# Altium PCB ADR1399_BURN-IN_TOOL.PcbDoc
Units mm, origin at the board's own origin, x right, y up, seen from the top; angles counter-clockwise.
Board outline 141.5 x 111.5 mm, 2 copper layers (Top Layer, Bottom Layer); 50 components, 23 nets, 131 pads, 60 vias.
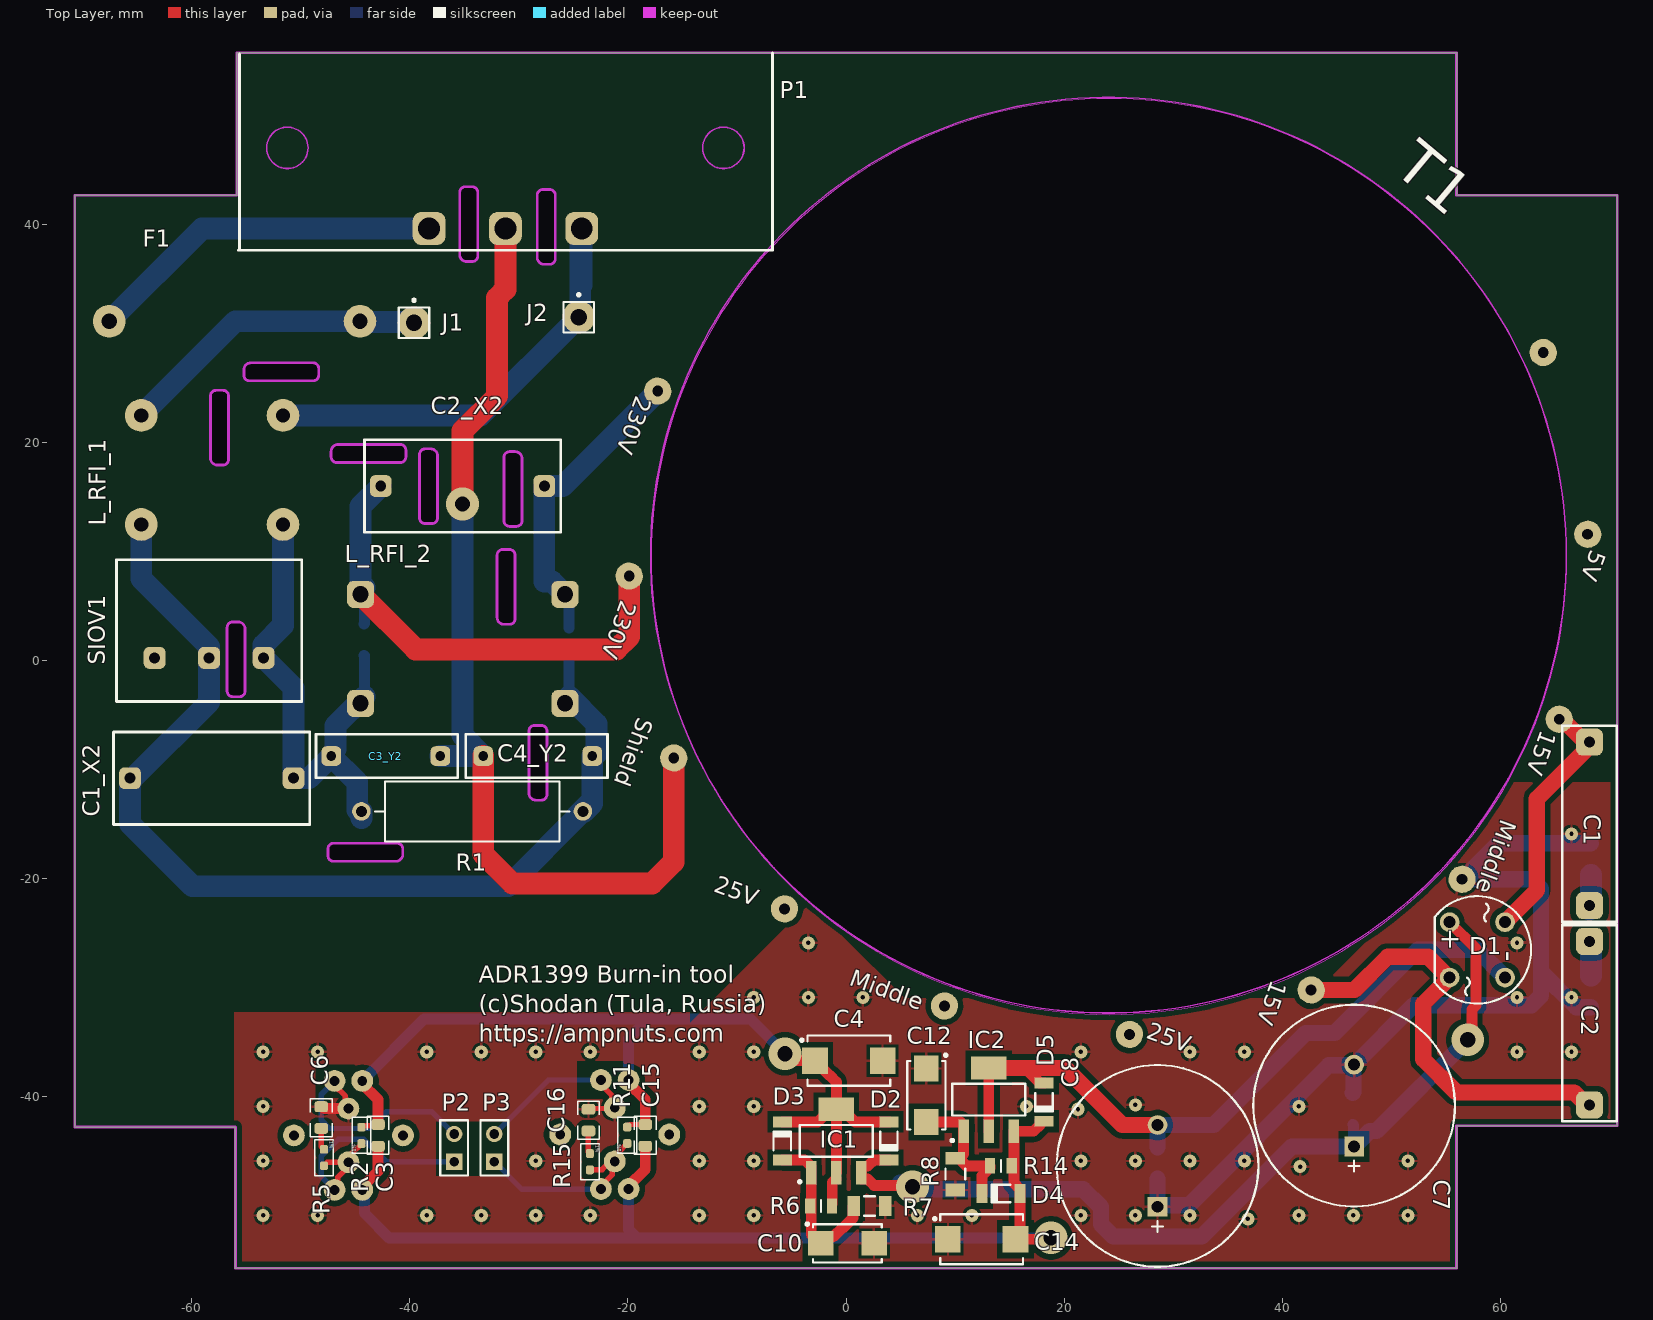
[diagram p0: Top Layer view]
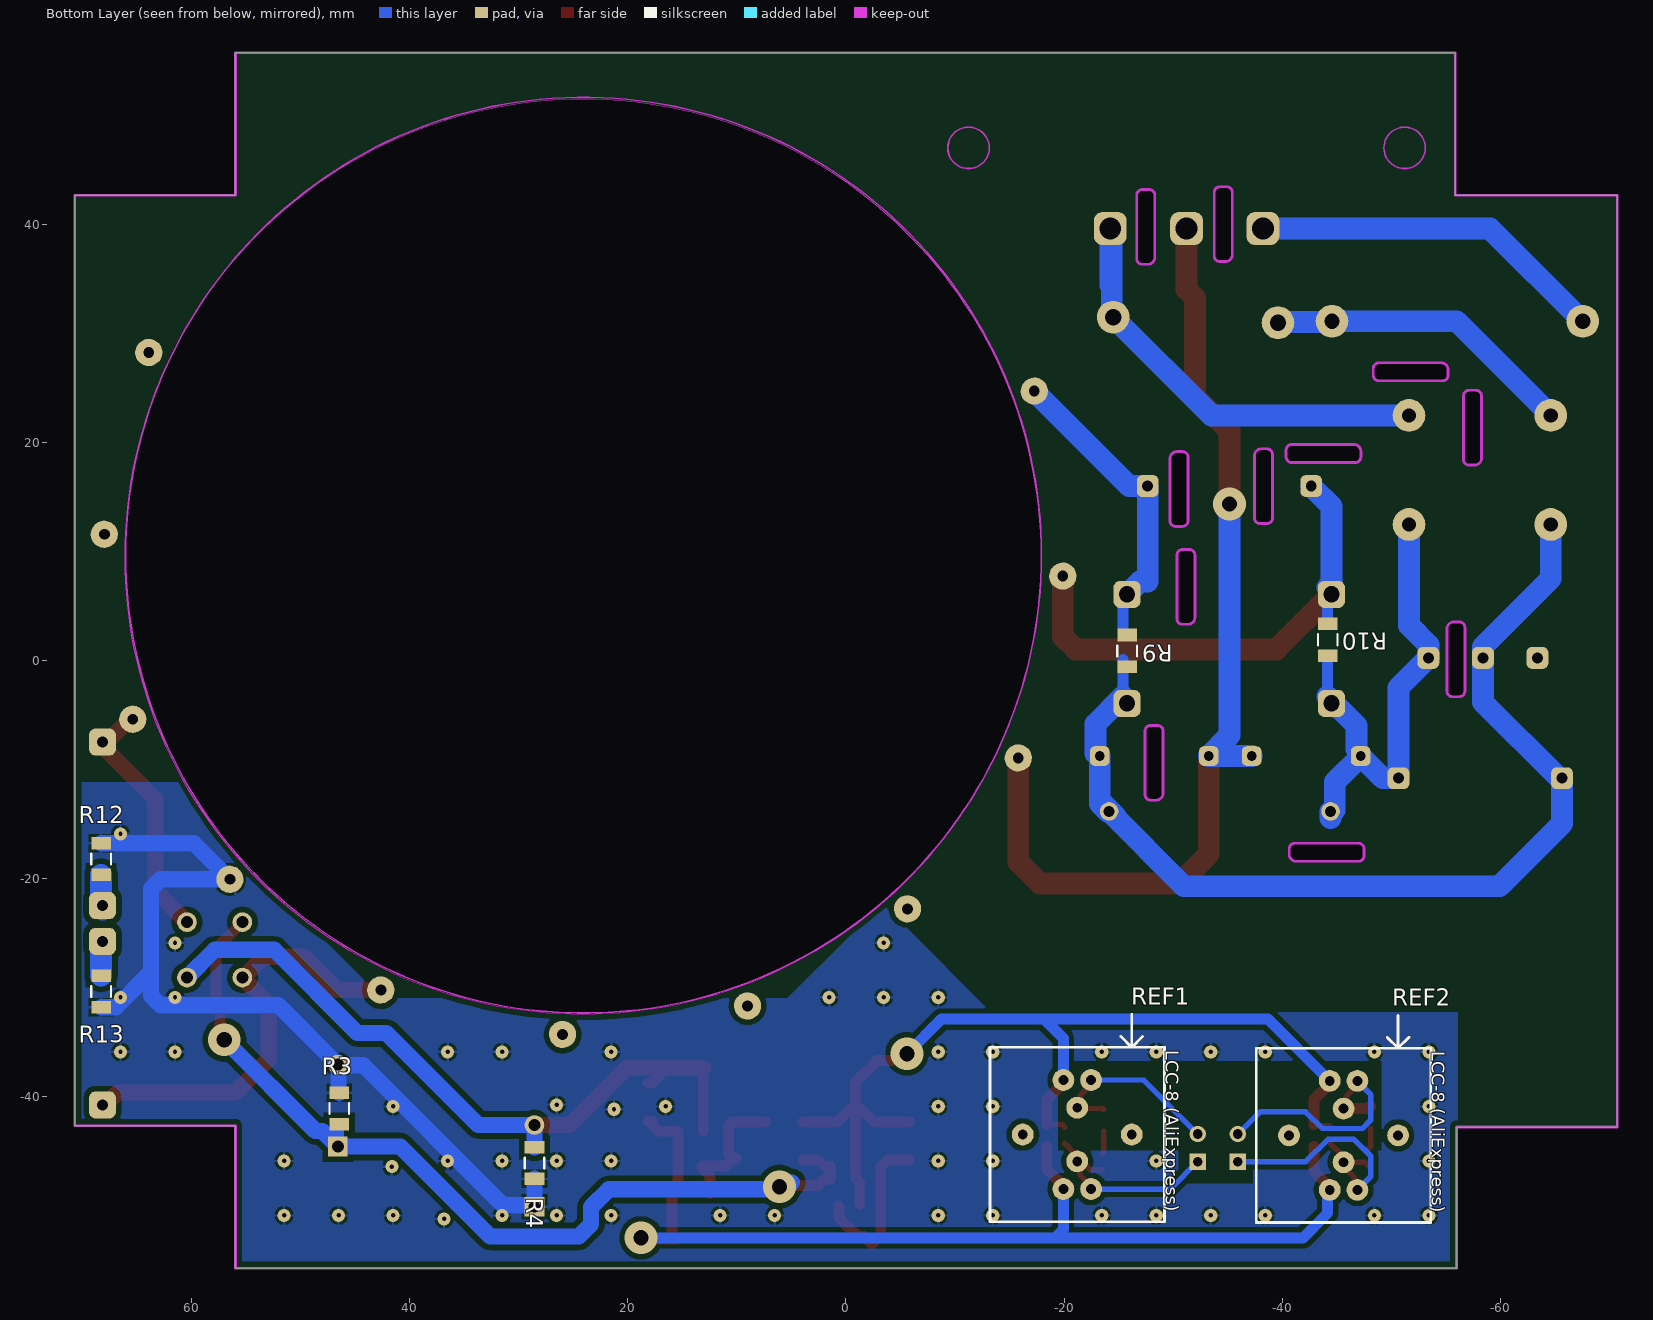
[diagram p1: Bottom Layer view, seen from below]
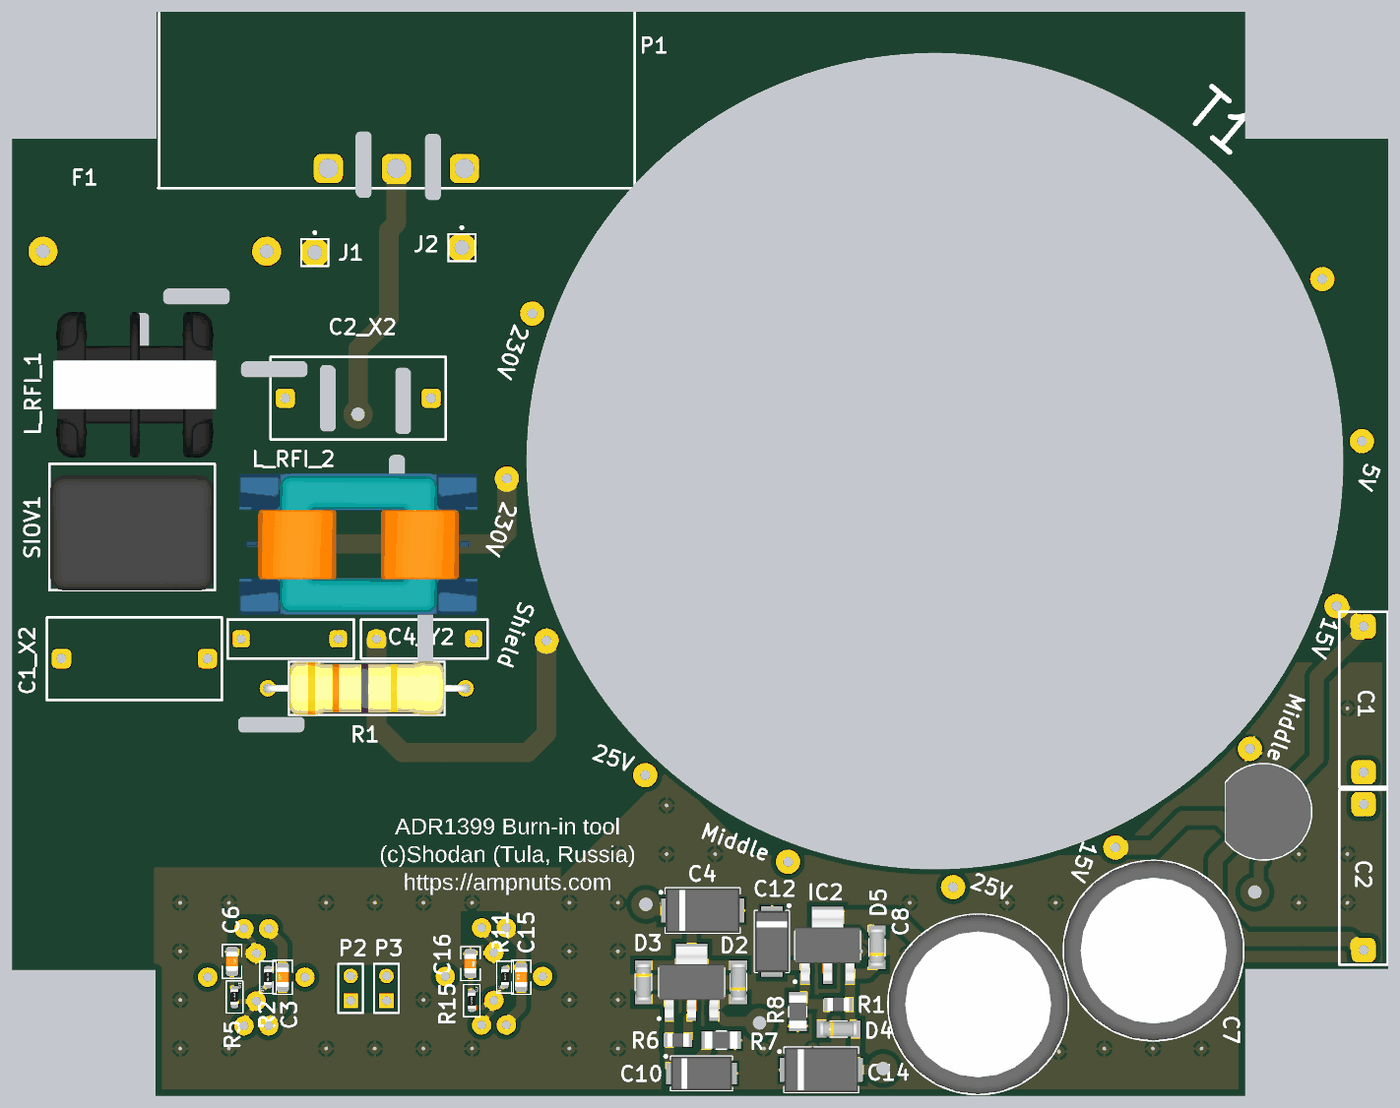
[diagram p2: 3D render of the assembled board from above, using the file's embedded part models]
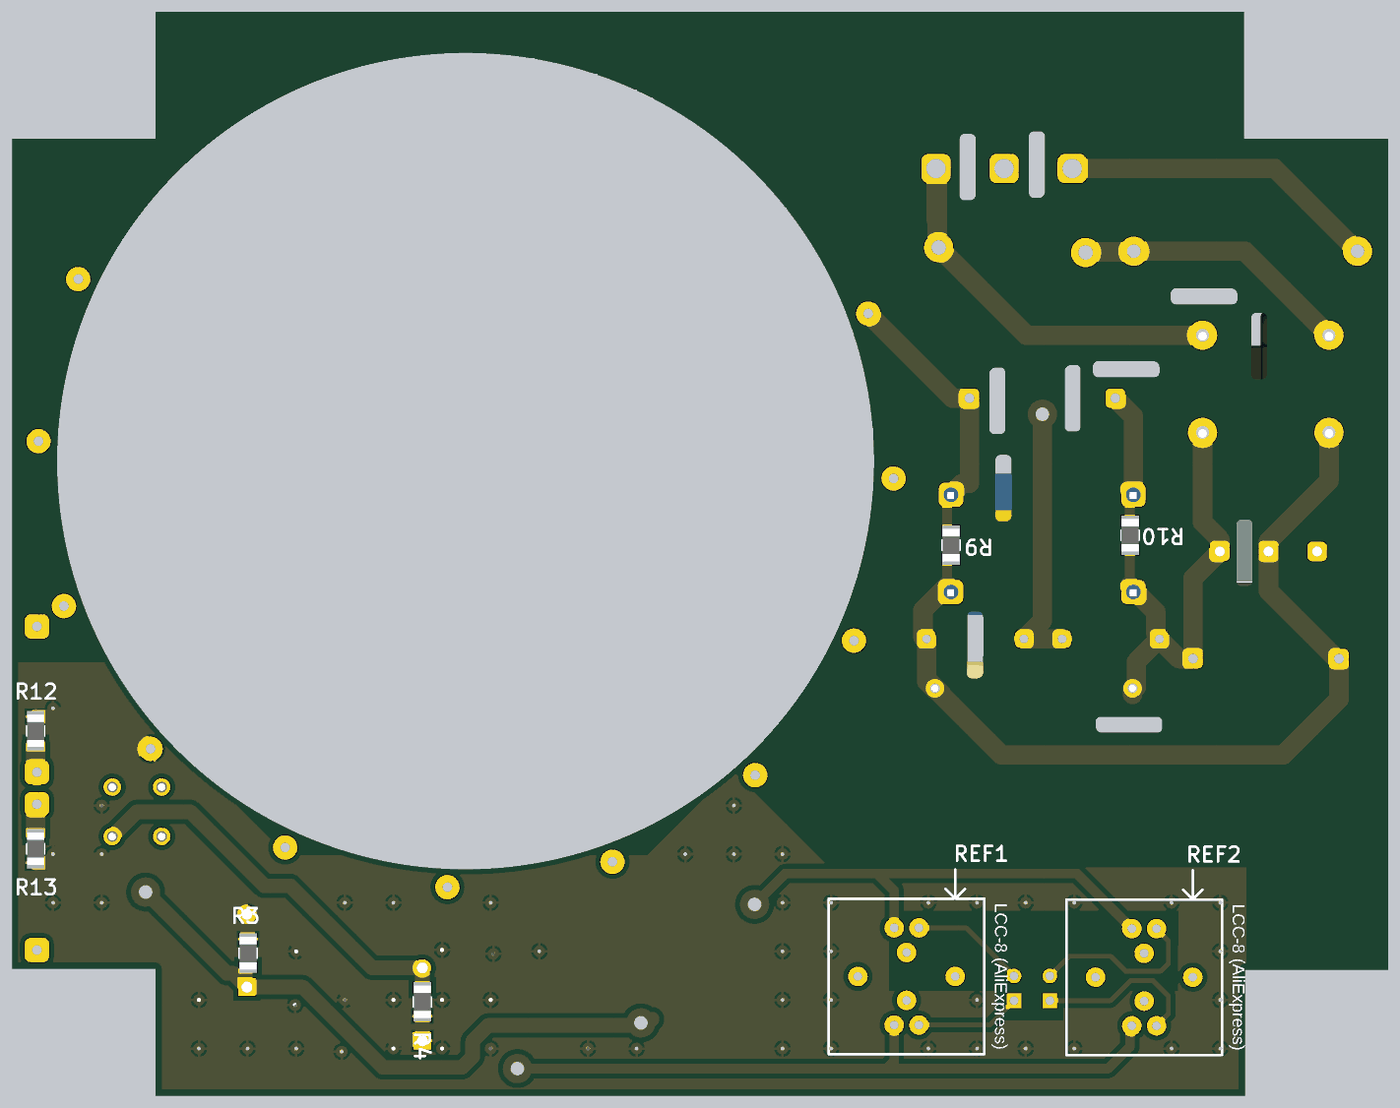
[diagram p3: 3D render of the assembled board from below, using the file's embedded part models]

## Layer stack, top to bottom
Top Solder: solder mask 0.0102, Solder Resist, Dk 3.5
Top Layer: signal copper 0.0356
Dielectric 1: dielectric 0.32, FR-4, Dk 4.8
Bottom Layer: signal copper 0.0356
Bottom Solder: solder mask 0.0102, Solder Resist, Dk 3.5

## Board outline
-56.007,-55.753 -56.007,-42.799 -70.75,-42.799 -70.75,42.672 -55.88,42.672 -55.88,55.75 56.007,55.75 56.007,42.672 70.75,42.672 70.75,-42.672 56.007,-42.672 56.007,-55.75
cut-out: -35.433,37.228 -35.433,42.943 cw(c-34.925,42.943) -34.925,43.451 -34.29,43.451 cw(c-34.29,42.943) -33.782,42.943 -33.782,37.101 cw(c-34.29,37.101) -34.29,36.593 -34.798,36.593 cw(c-34.798,37.228)
cut-out: -28.321,36.974 -28.321,42.689 cw(c-27.813,42.689) -27.813,43.197 -27.178,43.197 cw(c-27.178,42.689) -26.67,42.689 -26.67,36.847 cw(c-27.178,36.847) -27.178,36.339 -27.686,36.339 cw(c-27.686,36.974)
cut-out: -58.293,18.559 -58.293,24.274 cw(c-57.785,24.274) -57.785,24.782 -57.15,24.782 cw(c-57.15,24.274) -56.642,24.274 -56.642,18.432 cw(c-57.15,18.432) -57.15,17.924 -57.658,17.924 cw(c-57.658,18.559)
cut-out: -54.72,25.654 cw(c-54.72,26.162) -55.228,26.162 -55.228,26.67 cw(c-54.593,26.67) -54.593,27.305 -48.878,27.305 cw(c-48.878,26.797) -48.37,26.797 -48.37,26.162 cw(c-48.878,26.162) -48.878,25.654
cut-out: -38.608,12.556 cw(c-38.608,13.064) -39.116,13.064 -39.116,18.906 cw(c-38.608,18.906) -38.608,19.414 -38.1,19.414 cw(c-38.1,18.779) -37.465,18.779 -37.465,13.064 cw(c-37.973,13.064) -37.973,12.556
cut-out: -32.004,3.954 -32.004,9.669 cw(c-31.496,9.669) -31.496,10.177 -30.861,10.177 cw(c-30.861,9.669) -30.353,9.669 -30.353,3.827 cw(c-30.861,3.827) -30.861,3.319 -31.369,3.319 cw(c-31.369,3.954)
cut-out: -30.861,12.302 cw(c-30.861,12.81) -31.369,12.81 -31.369,18.652 cw(c-30.861,18.652) -30.861,19.16 -30.353,19.16 cw(c-30.353,18.525) -29.718,18.525 -29.718,12.81 cw(c-30.226,12.81) -30.226,12.302
cut-out: -46.719,18.161 cw(c-46.719,18.669) -47.227,18.669 -47.227,19.177 cw(c-46.592,19.177) -46.592,19.812 -40.877,19.812 cw(c-40.877,19.304) -40.369,19.304 -40.369,18.669 cw(c-40.877,18.669) -40.877,18.161
cut-out: -47.515,-17.907 -47.515,-17.272 cw(c-47.007,-17.272) -47.007,-16.764 -41.165,-16.764 cw(c-41.165,-17.272) -40.657,-17.272 -40.657,-17.78 cw(c-41.292,-17.78) -41.292,-18.415 -47.007,-18.415 cw(c-47.007,-17.907)
cut-out: -29.083,-12.175 -29.083,-6.46 cw(c-28.575,-6.46) -28.575,-5.952 -27.94,-5.952 cw(c-27.94,-6.46) -27.432,-6.46 -27.432,-12.302 cw(c-27.94,-12.302) -27.94,-12.81 -28.448,-12.81 cw(c-28.448,-12.175)
cut-out: -56.769,-2.811 -56.769,3.031 cw(c-56.261,3.031) -56.261,3.539 -55.753,3.539 cw(c-55.753,2.904) -55.118,2.904 -55.118,-2.811 cw(c-55.626,-2.811) -55.626,-3.319 -56.261,-3.319 cw(c-56.261,-2.811)
cut-out: -17.87,9.525 ccw(c24.13,9.525) 24.13,-32.475 ccw(c24.13,9.525) 66.13,9.525 ccw(c24.13,9.525) 24.13,51.525 ccw(c24.13,9.525)

## Design rules (kind name [scope] priority, off if disabled: settings)
Clearance [All] p1: gap=0.5 ignorepadtopadclearanceinfootprint=FALSE
Height [All] p1: minheight=0 maxheight=40 prefheight=12.7
PolygonConnect [All] p1: connectstyle=Relief reliefconductorwidth=0.254 reliefentries=4 polygonreliefangle="90 Angle" airgapwidth=0.254
RoutingVias [All] p1: holewidth=0.711 width=1.27 viastyle="Through Hole" minholewidth=0.711 minwidth=1.27 maxholewidth=0.711 maxwidth=1.27
SolderMaskExpansion [All] p1: expansion=0.102 istentingtop=FALSE
Width [All] p1: maxlimit=4 minlimit=0.254 preferedwidth=2
29 further rules are at their usual default settings.

## Components (designator, comment, footprint, x,y, rotation, side; value= is the part's Value field where it differs from the comment)
C1 "1uF 63VAC" B32522C1105 68.199,-22.479 r90 top
C1_X2 "B32922C3104K 100nF" B32922D3334K -50.673,-10.795 r180 top value=330nF
C2 "1uF 63VAC" B32522C1105 68.199,-40.767 r90 top
C2_X2 "B32922C3104K 100nF" B32922D3334K -42.672,16.002 r0 top value=330nF
C3 "1uF" C0805(2013) -42.926,-43.561 r90 top
C3_Y2 "B32021A3152 1.5nF" B32021A3152 -37.211,-8.763 r180 top value=330nF
C4 "2.2uF 50V D" CAPMP7343X310N 0.254,-36.703 r0 top
C4_Y2 "B32021A3152 1.5nF" B32021A3152 -33.274,-8.763 r0 top value=330nF
C6 "1uF" C0805(2013) -48.133,-41.926 r270 top
C7 "2200uF 50V" CAPPR750-1850X3750 46.609,-40.827 r90 top
C8 "2200uF 50V" CAPPR750-1850X3750 28.575,-46.355 r90 top
C10 "10uF 35V C" CAPMP6032X280N 0.127,-53.467 r0 top
C12 "10uF 35V C" CAPMP6032X280N 7.366,-39.878 r270 top
C14 "2.2uF 50V D" CAPMP7343X310N 12.446,-53.086 r0 top
C15 "1uF" C0805(2013) -18.415,-43.561 r90 top
C16 "1uF" C0805(2013) -23.622,-42.164 r270 top
D1 "2W10G-E4/51" VISHAY_WOG 57.912,-26.543 r90 top
D2 "EGL1D" DIOMELF3515N 3.937,-44.069 r90 top
D3 "EGL1D" DIOMELF3515N -5.842,-44.069 r270 top
D4 "EGL1D" DIOMELF3515N 14.224,-48.895 r0 top
D5 "EGL1D" DIOMELF3515N 18.161,-40.513 r90 top
F1 "Fuse 0.5A" FUSE -67.577,31.115 r0 top
IC1 "LM317DCYR" SOT230P700X180-4N -0.889,-44.069 r90 top
IC2 "LM337IMP" SOT230P700X180-4N 13.095,-40.28 r90 top
J1 "Socket" PIN1 -39.624,30.988 r0 top
J2 "Socket" PIN1 -24.511,31.496 r0 top
L_RFI_1 "PLA10AN2221R5R2B" PLA10AN2221R5R2B -64.643,12.479 r90 top
L_RFI_2 "B82732F2601B001" B82732F -44.531,6.063 r0 top
P1 "Plug AC Male" AS-205 -31.242,39.624 r0 top
P2 "Header 2" HDR1X2 -35.941,-45.974 r90 top
P3 "Header 2" HDR1X2 -32.258,-45.974 r90 top
R1 "1M 2W" RES_TYCO_CFR200 -34.29,-13.843 r0 top
R2 "2K67" R0603-1% -44.45,-43.561 r90 top
R3 "6k8 1206" RESC3216X65N 46.482,-41.095 r270 bottom
R4 "6k8 1206" RESC3216X65N 28.575,-46.101 r270 bottom
R5 "5R1" R0603-1% -47.879,-45.593 r270 top
R6 "220R 0805" RESC2012X60N -2.286,-50.038 r0 top
R7 "2k4 1206" RESC3216X65N 2.159,-50.038 r180 top
R8 "2k4 1206" RESC3216X65N 10.033,-47.117 r270 top
R9 "DNI (1206)" RESC3216X65N -25.781,0.889 r90 bottom
R10 "DNI (1206)" RESC3216X65N -44.196,1.905 r90 bottom
R11 "2K67" R0603-1% -20.066,-43.549 r90 top
R12 "10R (1206)" RESC3216X65N 68.326,-18.214 r270 bottom
R13 "10R (1206)" RESC3216X65N 68.326,-30.353 r90 bottom
R14 "220R 0805" RESC2012X60N 14.208,-46.355 r180 top
R15 "5R1" R0603-1% -23.495,-45.974 r270 top
REF1 "ADR1399KEZ" "LCC-8 socket" -21.209,-43.481 r270 bottom
REF2 "ADR1399KEZ" "LCC-8 socket" -45.64,-43.561 r270 bottom
SIOV1 "B72214T2271K105" B72214T2271K105 -58.42,0.237 r0 top
T1 "OCM T/230/E/50-25/30-15/5-0.025-50-II" "OCM T/230/E/50-25/30-15/5-0.025-50-II" 24.075,9.66 r250 top locked

## Footprints (in the part's own frame and the unit in brackets; to place one, negate y for a bottom-side part, rotate by r counter-clockwise, add the part's x,y. Pads: shape width x height; smd on the part's side, far side on the other; paste and mask are expansions set on the pad)
AS-205 [mm]
  rrect50% 3x3 hole 2: 1(-7,0) 2(7,0) 3(0,0)
  Keep-Out Layer circle w0.15: c20,7.4 r1.9
  Keep-Out Layer circle w0.15: c-20,7.4 r1.9
  silkscreen extent -24.5,-2 24.5,16.1
B32021A3152 [mm]
  rrect50% 1.8x1.8 hole 0.9: 1(0,0) 2(10,0)
  silkscreen extent -1.6,-2 11.4,2, body extent -1.7,-2 11.3,2, height 9
B32522C1105 [mm]
  rrect50% 2.5x2.5 hole 1: 1(0,0) 2(15,0)
  silkscreen extent -1.5,-2.5 16.5,2.5, body extent -1.5,-2.5 16.4,2.5, height 10.5
B32922D3334K [mm]
  rrect50% 2x2 hole 1: 1(0,0) 2(15,0)
  silkscreen extent -1.49,-4.25 16.51,4.26, body extent -1.5,-4.3 16.5,4.3, height 14.5
B72214T2271K105 [mm]
  rrect50% 2x2 hole 1: 1(5,0) 2(-5,0) 3(0,0)
  silkscreen extent -8.5,-4 8.5,9, body extent -8.4,-4 8.4,7.8, height 21.8
B82732F [mm]
  rrect50% 2.5x2.5 hole 1.5: 1(0,0) 2(0,-10) 3(18.75,-10) 4(18.75,0)
  body extent -2.86,-12.33 21.64,2.17, height 14.1
C0805(2013) [mm]
  rrect50% 1x1.25 smd: 1(-1,0) 2(1,0)
  silkscreen extent -1.75,-1 1.75,1, body extent -1,-0.62 1,0.63, height 0.73
CAPMP6032X280N [mm] "Capacitor, Polarized, Molded  Body 6.0x3.2mm, IPC Medium Density"
  rect 2.35x2.25 smd: 1(-2.45,0) 2(2.45,0)
  silkscreen extent -3.8,-1.75 3.15,1.9, body extent -3.15,-1.75 3.15,1.75, height 2.8
CAPMP7343X310N [mm] "Capacitor, Polarized, Molded  Body 7.3x4.3mm, IPC Medium Density"
  rect 2.35x2.45 smd: 1(-3.1,0) 2(3.1,0)
  silkscreen extent -4.42,-2.3 3.8,2.3, body extent -3.8,-2.3 3.8,2.3, height 3.1
CAPPR750-1850X3750 [mm] "Capacitor, Radial, Pin spacing 7.5mm - Body Diameter 18.5mm X Body  Height 37.5mm"
  rect 1.8x1.8 hole 1.1: 1(-3.75,0)
  round 1.8 hole 1.1: 2(3.75,0)
  silkscreen extent -9.25,-9.25 9.25,9.25, body extent -9.25,-9.22 9.25,9.22, height 37.5
DIOMELF3515N [mm] "SOD80C, MELF Diode, 2-Leads, Body 3.5x1.5mm, IPC Medium Density"
  rect 1x1.75 smd: 1(-1.75,0) 2(1.75,0)
  silkscreen extent -0.85,-0.8 0.85,0.8, body extent -1.85,-0.8 1.85,0.8, height 1.6
FUSE [mm]
  round 3 hole 1.4: 1(0,0) 2(23,0)
  body extent -1.95,-5.32 25.05,5.18, height 16
HDR1X2 [mm] "Connector; Header; 2 Position"
  rect 1.5x1.5 hole 0.9: 1(0,0)
  round 1.5 hole 0.9: 2(2.54,0)
  silkscreen extent -1.27,-1.27 3.81,1.27
"LCC-8 socket" [mm]
  round 2 hole 0.9: 1(-5,1.27) 2(-2.46,0) 3(-5,-1.27) 4(0,-5) 5(5,-1.27) 6(2.46,0) 7(5,1.27) 8(0,5)
  silkscreen extent -11,-8 8,8, body extent -8,-8 8,8, height 20
"OCM T/230/E/50-25/30-15/5-0.025-50-II" [mm]
  round 2.5 hole 1: 1(0,-44) 2(16.838,-40.651) 3(31.113,-31.113) 4(40.651,-16.838) 5(44,0) 6(40.651,16.838) 7(31.113,31.113) 8(16.838,40.651) 9(0,44) 10(-16.838,40.651) 11(-31.113,31.113)
  Keep-Out Layer circle w0.15: c0,0 r42
  body extent 4.5,-44.2 6.3,-43.1, height 1.27
PIN1 [mm] "Generic Antenna; 1 Lead"
  round 3 hole 1.5: 1(0,0)
  silkscreen extent -1.4,-1.4 1.4,2.17
PLA10AN2221R5R2B [mm]
  round 3 hole 1.3: 1(0,0) 2(10,0) 3(10,-13) 4(0,-13)
  body extent -2.6,-14.88 12.4,1.91, height 16.3
R0603-1% [mm]
  rrect50% 0.8x0.75 smd: 1(-0.75,0) 2(0.75,0)
  silkscreen extent -1.65,-0.85 1.65,0.85, body extent -0.8,-0.41 0.8,0.39, height 0.45
RES_TYCO_CFR200 [mm] "Resistor, Axial, Pad spacing 20.32mm - Body Lengh 16mm X Body Diameter 5.5mm"
  round 1.7 hole 1: 1(-10.16,0) 2(10.16,0)
  silkscreen extent -8.91,-2.75 8.91,2.75, body extent -10.53,-2.75 10.54,2.75, height 5.5
RESC2012X60N [mm] "Chip Resistor, EIA 0805, Metric 2012, Body 2.0x1.2mm, IPC Medium Density"
  rect 0.95x1.4 smd: 1(-1,0) 2(1,0)
  silkscreen extent 0,-0.55 0,0.55, body extent -1.1,-0.67 1.1,0.68, height 0.6
RESC3216X65N [mm] "Chip Resistor, EIA 1206, Metric 3216, Body 3.2x1.6mm, IPC Medium Density"
  rect 1.15x1.8 smd: 1(-1.45,0) 2(1.45,0)
  silkscreen extent -0.5,-0.9 0.5,0.9, body extent -1.67,-0.87 1.68,0.88, height 0.65
SOT230P700X180-4N [mm] "SOT223, 2.30mm pitch; 3 pin, 3.70mm W X 6.70mm L, IPC Medium Density"
  rect 2.15x0.95 smd: 1(-2.9,2.3) 2(-2.9,0) 3(-2.9,-2.3)
  rect 2.15x3.25 smd: 4(2.9,0)
  silkscreen extent -3.87,-3.35 1.45,3.47, body extent -3.65,-3.35 3.65,3.35, height 1.81
VISHAY_WOG [mm] "Bridge Rectifier, Body 9.35m x 8.33mm, VISHAY Case Type WOG"
  round 1.8 hole 1.1: 1(2.54,2.54) 2(2.54,-2.54) 3(-2.54,-2.54) 4(-2.54,2.54)
  silkscreen extent -4.93,-4.93 4.93,3.91, body extent -4.93,-4.93 4.93,3.91, height 13.5

## Part data
C1 C1_X2 C2 C2_X2 C3_Y2 C4_Y2: library part CPPR_330NF_630V_5%_2250-1050X2650X1650, "Non-polarised capacitor", Case="LS22.5 W10.5 x L26.5 x H16.5", Manufacturer=TDK, Manufacturer Part Number=B32653A6334J000, Tolerance=±5%, Voltage=630VDC/250VAC, Author="CERN DEM JLC", Component Type=Standard, ComponentHeight=16.5mm, CreateDate=20.12.2007, HelpURL=\\cern.ch\dfs\Applications\Altium\Datasheets\CPPR_TDK_B32653.pdf, LatestRevisionDate=22.04.2015, Mounted=Yes, Part Description="Metallized Polypropylene Film Capacitor (MKP)", Part Number=CPPR_330NF_630V_5%_2250-1050X2650X1650, Pin Count=2, Sense=No, SMD=No, Socket=No, Status=None
C3 C6 C15 C16: library part CC1206_1UF_25V_10%_X7R, "Non-polarised capacitor", Case=1206, Manufacturer=GENERIC, Manufacturer1 ComponentHeight=1.75mm, Manufacturer1 Example=KEMET, Manufacturer1 Part Number=C1206C105K3RAC, Tolerance=±10%, Voltage=25V, Author="CERN DEM JLC", Component Type=Standard, CreateDate=03.12.2007, HelpURL=\\cern.ch\dfs\Applications\Altium\Datasheets\CC1206_X7R_KEMET.pdf, LatestRevisionDate=03.12.2007, Manufacturer Part Number=CC1206_1UF_25V_10%_X7R, Mounted=Yes, Part Description="SMD Multilayer Chip Ceramic Capacitor", Part Number=CC1206_1UF_25V_10%_X7R, Pin Count=2, Sense=No, SMD=Yes, Socket=No, Status=Preferred, TC=X7R
C4 C14: library part CTE7343-31_22UF_35V_20%_LESR0400, "Polarised capacitor", Case=D, Manufacturer=GENERIC, Manufacturer1 ComponentHeight=3.1mm, Manufacturer1 Example=AVX, Manufacturer1 Part Number=TPSD226M035R0400, Tolerance=±20%, Voltage=35V, Author="CERN DEM MR", Component Type=Standard, CreateDate=19.05.2016, HelpURL=\\cern.ch\dfs\Applications\Altium\Datasheets\CTE-LESR_AVX_TPS.pdf, LatestRevisionDate=19.05.2016, Manufacturer Part Number=CTE7343-31_22UF_35V_20%_LESR0400, Mounted=Yes, Part Description="Low ESR 0R4 Solid Tantalum Chip Capacitor", Part Number=CTE7343-31_22UF_35V_20%_LESR0400, Pin Count=2, Sense=No, SMD=Yes, Socket=No, Status=None
C7 C8: library part CAER_10000UF_16V_20%_CHEMI-CON_EKYB160ELL103MMP1S, "Polarised capacitor", Case="LS7.5 D18 x H35.5", Manufacturer="UNITED CHEMI-CON", Manufacturer Part Number=EKYB160ELL103MMP1S, Tolerance=±20%, Voltage=16V, Author="CERN DEM JLC", Component Type=Standard, ComponentHeight=37mm, CreateDate=02.06.2015, HelpURL=\\cern.ch\dfs\Applications\Altium\Datasheets\CAER_CHEMI-CON_KYB.pdf, LatestRevisionDate=02.06.2015, Mounted=Yes, Part Description="Z=0R012 Miniature Aluminium Electrolytic Capacitor", Part Number=CAER_10000UF_16V_20%_CHEMI-CON_EKYB160ELL103MMP1S, Pin Count=2, Sense=Yes, SMD=No, Socket=No, Status=None
C10 C12: library part CTE6032-28_10UF_25V_10%_LESR0500, "Polarised capacitor", Case=C, Manufacturer=GENERIC, Manufacturer1 ComponentHeight=2.8mm, Manufacturer1 Example=AVX, Manufacturer1 Part Number=TPSC106K025R0500, Tolerance=±10%, Voltage=25V, Author="CERN DEM JLC", Component Type=Standard, CreateDate=05.05.2008, HelpURL=\\cern.ch\dfs\Applications\Altium\Datasheets\CTE-LESR_AVX_TPS.pdf, LatestRevisionDate=20.01.2009, Manufacturer Part Number=CTE6032-28_10UF_25V_10%_LESR0500, Mounted=Yes, Part Description="Low ESR 0R5 Solid Tantalum Chip Capacitor", Part Number=CTE6032-28_10UF_25V_10%_LESR0500, Pin Count=2, Sense=No, SMD=Yes, Socket=No, Status=Preferred
D1: library part W005G-E4/51, "Bridge Rectifier 1+ 2AC 3- 4AC", Manufacturer="VISHAY GENERAL SEMICONDUCTOR", Power=1.5A, Voltage=50V, Author="CERN DEM JLC", Bonding=No, Component Type=Standard, ComponentHeight=13.5mm, CreateDate=20.09.2011, Device=2W10G-E4/51, HelpURL=\\cern.ch\dfs\Applications\Altium\Datasheets\W005G-E4-51.pdf, LatestRevisionDate=08.04.2016, Manufacturer Part Number=W005G-E4/51, Mounted=Yes, PackageDescription="Bridge Rectifier, Body 9.35m x 8.33mm, VISHAY Case Type WOG", Part Description="Glass Passivated Single-Phase Bridge Rectifier", Part Number=W005G-E4/51, Pin Count=4, PressFit=No, Sense=No, SMD=No, Socket=No
D2 D3 D4 D5: library part PMLL4148L, "Diode", Case=SOD-80C, Manufacturer="NXP SEMICONDUCTORS", Power=200mA, Voltage=75V, Author="CERN DEM JLC", Bonding=No, Component Type=Standard, ComponentHeight=1.6mm, CreateDate=30.03.2009, Device=EGL1D, HelpURL=\\cern.ch\dfs\Applications\Altium\Datasheets\PMLL4148L.pdf, LatestRevisionDate=09.12.2009, Manufacturer Part Number=PMLL4148L, Mounted=Yes, PackageDescription="SOD80C, MELF Diode, 2-Leads, Body 3.5x1.5mm, IPC Medium Density", Part Description="High-speed switching diodes", Part Number=PMLL4148L, Pin Count=2, PressFit=No, Sense=No, SMD=Yes, Socket=No, Status="Not recommended"
F1: library part "Fuse 1", "Fuse", LatestRevisionDate=17-Jul-2002, LatestRevisionNote="Re-released for DXP Platform.", PackageDescription="Thru-Hole; 2 Leads", PackageReference=PIN-W2/E2.8, Published=8-Jun-2000, Publisher="Altium Limited"
IC1: library part LM317EMP, "3-Terminal Regulator 1=Adj 2=OUT 3=IN 4=OUT", Case=SOT-223, Manufacturer="TEXAS INSTRUMENTS", Author="CERN DEM JLC", Bonding=No, Component Type=Standard, ComponentHeight=1.8mm, CreateDate=02.12.2008, Device=LM317DCYR, HelpURL=\\cern.ch\dfs\Applications\Altium\Datasheets\LM317EMP.pdf, LatestRevisionDate=16.09.2014, Manufacturer Part Number=LM317EMP, Mounted=Yes, PackageDescription="SOT223, 2.30mm pitch; 3 pin, 3.70mm W X 6.70mm L, IPC Medium Density", Part Description="3-Terminal 1.2V To 37V 1A Positive Adjustable Regulator", Part Number=LM317EMP, Pin Count=4, PressFit=No, Sense=No, SMD=Yes, Socket=No, Status="Not Recommended"
IC2: library part LM337IMP/NOPB, "3-Terminal Regulator 1=Adj 2=IN 3=OUT 4=IN", Case=SOT-223, Manufacturer="TEXAS INSTRUMENTS", Author="CERN DEM JLC", Bonding=No, Component Type=Standard, ComponentHeight=1.8mm, CreateDate=31.08.2010, Device=LM337IMP, HelpURL=\\cern.ch\dfs\Applications\Altium\Datasheets\LM337IMP-NOPB.pdf, LatestRevisionDate=21.09.2015, Manufacturer Part Number=LM337IMP/NOPB, Mounted=Yes, PackageDescription="SOT223, 2.30mm pitch; 3 pin, 3.70mm W X 6.70mm L, IPC Medium Density", Part Description="3-Terminal -1.2V To -37V 1A Adjustable Negative Regulator", Part Number=LM337IMP/NOPB, Pin Count=4, PressFit=No, Sense=No, SMD=Yes, Socket=No
L_RFI_2: library part PLA10AN2221R5R2B
P1: "IEC Mains Power Inlet, EN60 320-1 C14 Class I Cold Condition, PC Flange Rear Mount, Chassis Plug", MaximumRating="10A, 250V a.c. (UL & CSA 15A, 250V a.c.)", PackageDocument="ver.80, 15-Sep-2003", ComponentLink1Description="Manufacturer Link", ComponentLink1URL=http://www.bulgin.co.uk/, DatasheetDocument="ver.80, 15-Sep-2003", DrillSize="Corresponds to nominal value.", LatestRevisionDate=15-Jul-2004, LatestRevisionNote="Component Replaced.", MountingFixtures="Not drawn on schematic symbol.", Note="IEC Color Scheme employed for L, N and E.", PackageReference=PX0580/PC, PCB_Layout="Complies with manufacturer's recommendation.", Published=15-Jul-2004, Publisher="Altium Limited", Terminations="P.C. Spills"
P2 P3: "Header, 2-Pin", LatestRevisionDate=17-Jul-2002, LatestRevisionNote="Re-released for DXP Platform.", Publisher="Altium Limited"
R1: library part RCF_NO-VALUE_5%_2W_0-450PPM_TYCO_CFR200, "Resistor - 5%", Case="LS20.32 L16 x D5.5", Manufacturer="TYCO ELECTRONICS", Manufacturer Part Number=CFR200J, Power=2W, Tolerance=±5%, Author="CERN DEM JLC", Component Type=Standard, ComponentHeight=5.5mm, CreateDate=10.03.2014, HelpURL=\\cern.ch\dfs\Applications\Altium\Datasheets\RCF_TYCO_CFR200.pdf, LatestRevisionDate=03.06.2014, Mounted=No, Part Description="Carbon Film Fixed Resistor - CFR  Series", Part Number=RCF_NO-VALUE_5%_2W_0-450PPM_TYCO_CFR200, Pin Count=2, PressFit=No, Sense=No, SMD=No, Socket=No, Status=None, TC="0 -450ppm/°C"
R2 R5 R11 R15: library part R1206_5R6_1%_0.25W_200PPM, "Resistor - 1%", Case=1206, Manufacturer=GENERIC, Manufacturer1 ComponentHeight=0.65mm, Manufacturer1 Example="YAGEO PHYCOMP", Manufacturer1 Part Number="232272465608L or RC1206FR-075R6L", Power=0.25W, Tolerance=±1%, Author="CERN DEM JLC", Component Type=Standard, CreateDate=24.06.2009, HelpURL=\\cern.ch\dfs\Applications\Altium\Datasheets\R1206_Phycomp_RC1206.pdf, LatestRevisionDate=17.10.2012, Manufacturer Part Number=R1206_5R6_1%_0.25W_200PPM, Mounted=Yes, Part Description="General Purpose Thick Film Chip Resistor", Part Number=R1206_5R6_1%_0.25W_200PPM, Pin Count=2, PressFit=No, Sense=No, SMD=Yes, Socket=No, Status=Preferred, TC=±200ppm/°C
R3 R4 R7 R8 R9 R10 R12 R13: library part R1206_2K4_1%_0.25W_100PPM, "Resistor - 1%", Case=1206, Manufacturer=GENERIC, Manufacturer1 ComponentHeight=0.65mm, Manufacturer1 Example="NIC COMPONENT", Manufacturer1 Part Number=NRC12F2401TRF, Power=0.25W, Tolerance=±1%, Author="CERN DEM JLC", Component Type=Standard, CreateDate=03.12.2007, HelpURL=\\cern.ch\dfs\Applications\Altium\Datasheets\R1206_NIC_NRC.pdf, LatestRevisionDate=13.03.2008, Manufacturer Part Number=R1206_2K4_1%_0.25W_100PPM, Mounted=Yes, Part Description="General Purpose Thick Film Chip Resistor", Part Number=R1206_2K4_1%_0.25W_100PPM, Pin Count=2, PressFit=No, Sense=No, SMD=Yes, Socket=No, Status=Preferred, TC=±100ppm/°C
R6 R14: library part R0805_220R_1%_0.125W_100PPM, "Resistor - 1%", Case=0805, Manufacturer=GENERIC, Manufacturer1 ComponentHeight=0.6mm, Manufacturer1 Example="NIC COMPONENT", Manufacturer1 Part Number=NRC10F2200TRF, Power=0.125W, Tolerance=±1%, Author="CERN DEM JLC", Component Type=Standard, CreateDate=03.12.2007, HelpURL=\\cern.ch\dfs\Applications\Altium\Datasheets\R0805_NIC_NRC.pdf, LatestRevisionDate=13.03.2008, Manufacturer Part Number=R0805_220R_1%_0.125W_100PPM, Mounted=Yes, Part Description="General Purpose Thick Film Chip Resistor", Part Number=R0805_220R_1%_0.125W_100PPM, Pin Count=2, PressFit=No, Sense=No, SMD=Yes, Socket=No, Status=Preferred, TC=±100ppm/°C
J1 J2: LatestRevisionDate=17-Jul-2002, LatestRevisionNote="Re-released for DXP Platform.", Publisher="Altium Limited"
SIOV1: LatestRevisionDate=29-May-2009, LatestRevisionNote="IPC-7351 Footprint Added.", Order=B72214T2271K105, PackageDescription="Chip Resistor", PackageReference=J1-0603, Published=8-Jun-2000, Publisher="Altium Limited"

## Via types
v1: diameter 1.2, hole 0.4, Top Layer to Bottom Layer, tented both sides, 55 vias
v2: diameter 3, hole 1.4, Top Layer to Bottom Layer, tented both sides, 5 vias

## Nets (pads, with @x,y where several pads share a name; then routed paths per layer and width w, separated by ;. In a path a pad name is that pad's centre, name@x,y a point inside that pad or via, vN(x,y) a via of type N, cw(c..) or ccw(c..) an arc to the next point about the centre after c; other vN are vias at no path point)
+15V: C3.2 C4.1 C15.2 D2.2 D3.1 IC1.2 IC1.4 R2.2 R6.2 R11.2 REF1.3 REF2.3 | length 88.6
  Top Layer w0.5: R2.2 -44.325,-42.686 -43.051,-42.686 C3.2 ; R11.2 -20.066,-42.774 -19.853,-42.561 C15.2
  Top Layer w1: REF2.3 -44.37,-38.832 -42.926,-40.276 C3.2 ; REF1.3 -19.939,-38.752 -18.415,-40.276 C15.2 ; D3.1 -2.589,-42.319 -1.439,-41.169 IC1.4 ; v2@-5.588,-36.449 -5.334,-36.703 C4.1 -2.846,-36.753 -1.525,-38.074 -1.475,-38.074 -0.889,-38.66 IC1.4 ; R6.2@-1.261,-49.838 -1.261,-47.891 IC1.2@-0.914,-47.544 ; IC1.2 IC1.4 ; D2.2 0.811,-42.319 -0.339,-41.169 IC1.4
  Bottom Layer w1: REF2.3 -38.702,-32.893 -18.161,-32.893 ; REF1.3 -19.939,-34.671 -18.161,-32.893 ; v2(-5.588,-36.068) -8.763,-32.893 -18.161,-32.893
+22V_unreg: C7.1 D1.1 D2.1 IC1.3 R3.2 | length 85.6
  Top Layer w1: D2.1 2.561,-45.819 1.986,-46.394 1.436,-46.394 1.411,-46.419 IC1.3 1.411,-47.519 1.436,-47.544 1.986,-47.544 2.58,-48.138 5.974,-48.138 v2(6.096,-48.26) ; D1.1 57.785,-26.416 57.785,-31.623 57.406,-32.002 57.406,-34.415 v2(57.023,-34.798)
  Bottom Layer w1: R3.2 46.545,-42.608 46.545,-44.514 C7.1
  Bottom Layer w1.5: v2@4.953,-47.879 5.588,-48.514 21.773,-48.514 23.392,-50.133 23.392,-51.713 24.511,-52.832 32.639,-52.832 40.894,-44.577 C7.1 48.029,-43.157 48.664,-43.157 v2(57.023,-34.798)
-15V: C3.1 C14.2 C15.1 D4.2 D5.1 IC2.3 R14.1 REF1.5 REF2.5 | length 99
  Top Layer w1: REF2.5 -44.37,-48.29 -42.926,-46.846 C3.1 ; REF1.5 -19.939,-48.21 -18.415,-46.686 C15.1 ; D5.1 17.786,-42.263 17.786,-42.594 17.2,-43.18 IC2.3 15.395,-47.941 15.974,-48.52 D4.2 15.974,-52.658 C14.2 18.415,-53.086 v2@18.542,-53.213
  Bottom Layer w0.5: REF2.5 -44.37,-50.499 -44.179,-50.69 -43.942,-50.927
  Bottom Layer w1: REF2.5 -44.179,-48.752 -44.179,-50.69 ; -43.942,-50.927 -41.91,-52.959 -19.177,-52.959 ; REF1.5 -19.939,-52.197 -19.177,-52.959 ; v2(18.796,-52.959) -19.177,-52.959
-22V_unreg: C8.2 D1.3 D5.2 IC2.2 IC2.4 R4.1 | length 67.4
  Top Layer w1: IC2.2 IC2.4 ; 16.403,-37.38 17.786,-38.763 D5.2
  Top Layer w1.5: IC2.4 16.403,-37.38 20.108,-37.38 25.333,-42.605 C8.2
  Bottom Layer w1.5: R4.1 C8.2 33.722,-42.605 42.164,-34.163 44.831,-34.163 52.451,-26.543 57.912,-26.543 D1.3
AGND_22: C4.2 C6.1 C7.2 C8.1 C10.2 C12.1 C14.1 C16.1 P2.2 P3.2 R3.1 R4.2 R7.1 R8.2 R12.1 R13.1 REF1.1 REF1.2 REF2.1 REF2.2 T1.8 | length 128.3
  Top Layer w0.5: C6.1 -48.045,-41.013 -47.921,-41.013 -45.728,-41.013 REF2.2 ; REF2.1 -46.91,-38.967 -45.927,-39.95 REF2.2@-45.927,-40.814 ; C16.1 -23.55,-41.092 -21.28,-41.092 REF1.2 -21.496,-40.734 -21.496,-39.87 -22.479,-38.887 REF1.1
  Top Layer w1: C6.1 -48.008,-40.926 -47.921,-41.013 -47.833,-41.101 REF2.2
  Bottom Layer w0.5: REF2.1 -46.91,-38.59 -48.133,-39.813 -48.133,-42.164 -47.371,-42.926 -43.688,-42.926 -42.164,-41.402 -37.973,-41.402 P2.2 ; P3.2 -27.305,-38.481 REF1.1
  Bottom Layer w1.5: R4.2 C8.1 28.725,-49.955 31.46,-49.955 44.281,-37.134 C7.2@46.552,-37.134 ; R3.1 46.552,-39.575 C7.2@46.552,-37.134 ; T1.8@56.706,-20.257 T1.8 ; R13.1 66.982,-31.803 63.754,-28.575 ; R12.1 59.817,-16.764 T1.8 ; C7.2@46.552,-37.134 C7.2 52.063,-31.623 62.875,-31.623 63.754,-30.744 63.754,-28.575 ; T1.8 62.875,-20.066 63.754,-20.945 63.754,-28.575
  other v1: 36.865,-51.222 -53.458,-50.899 -48.458,-50.899 -38.458,-50.899 -33.458,-50.899 -28.458,-50.899 -23.458,-50.899 -13.458,-50.899 -8.458,-50.899 6.542,-50.899 11.542,-50.899 21.542,-50.899 26.542,-50.899 31.542,-50.899 41.542,-50.899 46.542,-50.899 51.542,-50.899 41.66,-46.427 -53.458,-45.899 -28.458,-45.899 -13.458,-45.899 -8.458,-45.899 21.542,-45.899 26.542,-45.899 31.542,-45.899 36.542,-45.899 51.542,-45.899 21.276,-41.165 -53.458,-40.899 -13.458,-40.899 -8.458,-40.899 16.542,-40.899 41.542,-40.899 26.542,-40.755 -53.458,-35.899 -48.458,-35.899 -38.458,-35.899 -33.458,-35.899 -28.458,-35.899 -23.458,-35.899 -13.458,-35.899 -8.458,-35.899 21.542,-35.899 31.542,-35.899 36.542,-35.899 61.542,-35.899 66.542,-35.899 -8.458,-30.899 -3.458,-30.899 1.542,-30.899 61.542,-30.899 66.542,-30.899 -3.458,-25.899 61.542,-25.899 66.542,-15.899
NetC1_1: C1.1 R12.2 | length 3.2
  Bottom Layer w2: C1.1@68.199,-22.86 68.326,-22.733 R12.2
NetC1_2: C1.2 D1.2 T1.9 | length 23.2
  Top Layer w1.5: D1.2 63.373,-21.082 63.373,-12.686 68.199,-7.86 67.699,-7.36 67.663,-7.36 65.692,-5.389 T1.9
NetC1_X2_1: C1_X2.1 C3_Y2.2 L_RFI_1.4 L_RFI_2.2 R1.1 R10.1 SIOV1.1 | length 45.7
  Bottom Layer w1: R10.1 -44.173,0.432 -44.173,-3.279 L_RFI_2.2@-44.15,-3.302
  Bottom Layer w2: L_RFI_1.4 -51.643,3.221 -53.42,1.444 SIOV1.1 -50.673,-2.51 C1_X2.1 -49.243,-10.795 C3_Y2.2 -44.831,-11.143 R1.1@-44.831,-13.716 ; C3_Y2.2@-46.83,-8.128 -46.83,-5.982 L_RFI_2.2@-44.15,-3.302 ; R1.1@-44.45,-14.478 R1.1
NetC1_X2_2: C1_X2.2 C4_Y2.2 L_RFI_1.1 L_RFI_2.3 R1.2 R9.1 SIOV1.3 | length 96.8
  Bottom Layer w1: L_RFI_2.3@-25.4,-3.302 -25.4,0.074
  Bottom Layer w2: L_RFI_1.1 -64.643,7.493 -58.42,1.27 SIOV1.3 -58.42,-3.81 -65.405,-10.795 C1_X2.2 -65.673,-14.972 -59.944,-20.701 -30.988,-20.701 R1.2 ; L_RFI_2.3@-25.4,-3.302 -22.893,-5.809 C4_Y2.2@-22.893,-8.542 ; R1.2@-24.765,-14.351 -23.528,-13.114 ; R1.2@-24.066,-13.906 -23.274,-13.114 C4_Y2.2
NetC2_1: C2.1 D1.4 T1.7 | length 40.3
  Top Layer w1.5: T1.7 46.643,-30.218 49.683,-27.178 53.386,-27.178 55.291,-29.083 D1.4 52.959,-31.496 52.959,-36.576 56.007,-39.624 66.802,-39.624 C2.1@68.199,-41.021
NetC2_2: C2.2 R13.2 | length 2.9
  Bottom Layer w2: C2.2@68.199,-26.021 68.326,-26.148 R13.2
NetC2_X2_1: C2_X2.1 L_RFI_2.1 R10.2 T1.2 | length 46.8
  Top Layer w2: L_RFI_2.1 -39.484,1.016 -21.055,1.016 -19.883,2.188 T1.2
  Bottom Layer w1: R10.2 -44.173,3.378 L_RFI_2.1@-44.173,6.675
  Bottom Layer w2: L_RFI_2.1 -44.531,14.143 C2_X2.1 ; L_RFI_2.1@-44.173,6.675 L_RFI_2.1@-44.15,6.698
NetC2_X2_2: C2_X2.2 L_RFI_2.4 R9.2 T1.1 | length 28.9
  Bottom Layer w1: -25.4,2.974 L_RFI_2.4@-25.4,6.698
  Bottom Layer w2: L_RFI_2.4 -26.953,7.235 -27.672,7.235 C2_X2.2 -25.979,16.002 T1.1
NetC6_2: C6.2 R5.1 | length 2
  Top Layer w0.5: C6.2 -48.133,-44.564 -47.879,-44.818 R5.1
NetC10_1: C10.1 D3.2 IC1.1 R6.1 R7.2 | length 15.4
  Top Layer w1: D3.2 -3.789,-45.819 -3.189,-46.419 IC1.1 -3.189,-52.651 -2.373,-53.467 C10.1 -1.698,-52.842 -1.153,-52.842 -0.349,-52.038 -0.273,-52.038 0.634,-51.131 0.634,-50.113 R7.2
NetC12_2: C12.2 D4.1 IC2.1 R8.1 R14.2 | length 13.1
  Top Layer w1: C12.2 10.493,-42.328 10.795,-42.63 IC2.1 10.77,-43.205 10.77,-45.255 R8.1@10.358,-45.667 ; R8.1 R8.1@10.358,-45.667 ; D4.1 12.474,-47.264 13.208,-46.53 R14.2 11.046,-46.355 R8.1@10.358,-45.667
NetC16_2: C16.2 R15.1 | length 2.1
  Top Layer w0.5: C16.2 -23.622,-45.072 -23.495,-45.199 R15.1
NetF1_1: F1.1 P1.1 | length 32.9
  Bottom Layer w2: F1.1 -59.068,39.624 P1.1
NetF1_2: F1.2 J1.1 L_RFI_1.2 | length 28.6
  Bottom Layer w2: L_RFI_1.2 -56.007,31.115 F1.2 -44.514,31.051 -39.688,31.051 J1.1
NetJ2_1: J2.1 L_RFI_1.3 P1.2 | length 44.3
  Bottom Layer w2: L_RFI_1.3 -33.528,22.479 J2.1 -24.376,31.631 -24.376,39.489 P1.2 -24.242,34.432
NetP2_1: P2.1 R2.1 R5.2 REF2.6 REF2.7 | length 24.9
  Top Layer w0.5: R5.2 -47.879,-46.318 -47.582,-46.021 REF2.6 ; REF2.7 -46.623,-48.274 -46.623,-47.41 -45.64,-46.427 REF2.6 ; R2.1 -44.45,-44.336 -45.353,-45.239 -45.353,-45.734 REF2.6
  Bottom Layer w0.5: REF2.7 -46.91,-48.532 -48.133,-47.309 -48.133,-45.466 -46.593,-43.926 -44.212,-43.926 -42.164,-45.974 P2.1
NetP3_1: P3.1 R11.1 R15.2 REF1.6 REF1.7 | length 18.6
  Top Layer w0.5: R15.2 -23.467,-46.696 -22.37,-46.696 -21.615,-45.941 REF1.6 ; REF1.7 -22.479,-48.219 -21.451,-47.191 -21.451,-46.183 REF1.6 ; R11.1 -20.066,-44.324 -20.922,-45.18 -20.922,-45.654 REF1.6
  Bottom Layer w0.5: P3.1 -29.751,-48.481 REF1.7
PE: C3_Y2.1 C4_Y2.1 P1.3 T1.3 | length 92.7
  Top Layer w2: v2(-35.179,14.351) -35.179,21.082 -32.004,24.257 -32.004,33.274 -31.242,34.036 P1.3 ; C4_Y2.1 -33.274,-17.78 -30.607,-20.447 -17.78,-20.447 -15.803,-18.47 T1.3
  Bottom Layer w2: C3_Y2.1 C4_Y2.1 -35.179,-6.858 v2(-35.179,14.351)
pads on no net: REF1.4 REF1.8 REF2.4 REF2.8 SIOV1.2 T1.4 T1.5 T1.6 T1.10 T1.11

## Polygon pours and split planes (outlines as drawn)
AGND_22 on Top Layer "AGND_22_L01_P001" (solid, pour order 1): -56.134,-55.753 -56.134,-32.258 -14.351,-32.258 -14.351,-55.753
AGND_22 on Top Layer "AGND_22_L01_P000" (solid, pour order 0): 60.452,-11.049 60.579,-11.176 70.739,-11.176 70.739,-42.291 70.485,-42.545 55.88,-42.545 55.88,-55.499 56.007,-55.626 55.88,-55.753 -16.383,-55.753 -16.383,-35.359 -3.312,-22.287 5.389,-30.988 42.545,-30.988 59.563,-13.97
AGND_22 on Bottom Layer "AGND_22_L02_P003" (solid, pour order 3): -56.134,-55.753 -56.134,-32.258 -14.351,-32.258 -14.351,-55.753
AGND_22 on Bottom Layer "AGND_22_L02_P002" (solid, pour order 2): 60.452,-11.049 60.579,-11.176 70.739,-11.176 70.739,-42.291 70.485,-42.545 55.88,-42.545 55.88,-55.499 56.007,-55.626 55.88,-55.753 -16.383,-55.753 -16.383,-35.359 -3.312,-22.287 5.389,-30.988 42.545,-30.988 59.563,-13.97

## Keep-outs
Keep-Out Layer:
  lines w0.254: -56.007,-55.753 -56.007,-42.799 -70.739,-42.799 -70.739,42.672 -55.88,42.672 -55.88,55.753 ; -56.007,-55.75 56.007,-55.75 ; -55.88,55.75 56.007,55.75 ; 56.007,-55.753 56.007,-42.672 70.739,-42.672 ; 56.007,55.753 56.007,42.672 70.739,42.672 ; 70.75,-42.672 70.75,42.672 ; -58.293,18.559 ccw(c-57.658,18.559) -57.658,17.924 -57.15,17.924 ccw(c-57.15,18.432) -56.642,18.432 -56.642,24.274 ccw(c-57.15,24.274) -57.15,24.782 -57.785,24.782 ccw(c-57.785,24.274) -58.293,24.274 -58.293,20.972 -58.293,18.559 ; -56.769,-2.811 ccw(c-56.261,-2.811) -56.261,-3.319 -55.626,-3.319 ccw(c-55.626,-2.811) -55.118,-2.811 -55.118,0.491 -55.118,2.904 ccw(c-55.753,2.904) -55.753,3.539 -56.261,3.539 ccw(c-56.261,3.031) -56.769,3.031 -56.769,-2.811 ; -55.228,26.162 ccw(c-54.72,26.162) -54.72,25.654 -48.878,25.654 ccw(c-48.878,26.162) -48.37,26.162 -48.37,26.797 ccw(c-48.878,26.797) -48.878,27.305 -52.18,27.305 -54.593,27.305 ccw(c-54.593,26.67) -55.228,26.67 -55.228,26.162 ; -47.515,-17.907 ccw(c-47.007,-17.907) -47.007,-18.415 -43.705,-18.415 -41.292,-18.415 ccw(c-41.292,-17.78) -40.657,-17.78 -40.657,-17.272 ccw(c-41.165,-17.272) -41.165,-16.764 -47.007,-16.764 ccw(c-47.007,-17.272) -47.515,-17.272 -47.515,-17.907 ; -47.227,18.669 ccw(c-46.719,18.669) -46.719,18.161 -40.877,18.161 ccw(c-40.877,18.669) -40.369,18.669 -40.369,19.304 ccw(c-40.877,19.304) -40.877,19.812 -44.179,19.812 -46.592,19.812 ccw(c-46.592,19.177) -47.227,19.177 -47.227,18.669 ; -39.116,13.064 ccw(c-38.608,13.064) -38.608,12.556 -37.973,12.556 ccw(c-37.973,13.064) -37.465,13.064 -37.465,16.366 -37.465,18.779 ccw(c-38.1,18.779) -38.1,19.414 -38.608,19.414 ccw(c-38.608,18.906) -39.116,18.906 -39.116,13.064 ; -35.433,37.228 ccw(c-34.798,37.228) -34.798,36.593 -34.29,36.593 ccw(c-34.29,37.101) -33.782,37.101 -33.782,42.943 ccw(c-34.29,42.943) -34.29,43.451 -34.925,43.451 ccw(c-34.925,42.943) -35.433,42.943 -35.433,39.641 -35.433,37.228 ; -32.004,3.954 ccw(c-31.369,3.954) -31.369,3.319 -30.861,3.319 ccw(c-30.861,3.827) -30.353,3.827 -30.353,9.669 ccw(c-30.861,9.669) -30.861,10.177 -31.496,10.177 ccw(c-31.496,9.669) -32.004,9.669 -32.004,6.367 -32.004,3.954 ; -31.369,12.81 ccw(c-30.861,12.81) -30.861,12.302 -30.226,12.302 ccw(c-30.226,12.81) -29.718,12.81 -29.718,16.112 -29.718,18.525 ccw(c-30.353,18.525) -30.353,19.16 -30.861,19.16 ccw(c-30.861,18.652) -31.369,18.652 -31.369,12.81 ; -29.083,-12.175 ccw(c-28.448,-12.175) -28.448,-12.81 -27.94,-12.81 ccw(c-27.94,-12.302) -27.432,-12.302 -27.432,-6.46 ccw(c-27.94,-6.46) -27.94,-5.952 -28.575,-5.952 ccw(c-28.575,-6.46) -29.083,-6.46 -29.083,-9.762 -29.083,-12.175 ; -28.321,36.974 ccw(c-27.686,36.974) -27.686,36.339 -27.178,36.339 ccw(c-27.178,36.847) -26.67,36.847 -26.67,42.689 ccw(c-27.178,42.689) -27.178,43.197 -27.813,43.197 ccw(c-27.813,42.689) -28.321,42.689 -28.321,39.387 -28.321,36.974

## Other copper
Top Layer:
  pour cut-out: -24.638,-36.767 -24.638,-40.195 -20.447,-40.195 -20.447,-36.767
  pour cut-out: -48.641,-37.084 -48.641,-40.101 -45.085,-40.101 -45.085,-37.084
  pour cut-out: -37.592,-42.291 -37.592,-47.244 -30.988,-47.244 -30.988,-42.291
Bottom Layer:
  pour cut-out: -49.149,-39.497 -49.14,-39.497 -49.14,-44.958 -19.431,-44.958 -19.431,-36.703 -49.022,-36.703 -49.022,-36.957 -49.149,-36.957
  pour cut-out: -37.338,-42.037 -30.48,-42.037 -30.48,-48.006 -37.338,-48.006
  pour cut-out: -25.4,-36.703 -19.685,-36.703 -19.685,-40.259 -25.4,-40.259
  pour cut-out: -49.149,-36.703 -44.222,-36.703 -44.222,-40.259 -49.149,-40.259

## Silkscreen, mask and mechanical layers (free items; w line width, h text height)
Top Overlay:
  text "ADR1399 Burn-in tool / (c)Shodan (Tula, Russia) / https://ampnuts.com" at -33.677,-35.512 h2.7

## Text inside footprints (layer, text, board x,y; h text height)
D1: Top Overlay "+" at 56.192,-26.643 h1.8 r90; Top Overlay "-" at 61.432,-27.648 h2 r90; Mechanical 14 "+" at 56.192,-26.643 h1.8 r90; Mechanical 14 "-" at 61.432,-27.648 h2 r90
R2: Top Overlay "1%" at -44.85,-45.061 h0.5 r90
R5: Top Overlay "1%" at -47.479,-44.093 h0.5 r270
R11: Top Overlay "1%" at -20.466,-45.049 h0.5 r90
R15: Top Overlay "1%" at -23.095,-44.474 h0.5 r270
REF1: Bottom Overlay "LCC-8 (AliExpress)" at -28.895,-35.753 h2 r90
REF2: Bottom Overlay "LCC-8 (AliExpress)" at -53.326,-35.833 h2 r90
T1: Top Overlay "15V" at 39.065,-29.221 h1.52 r250; Top Overlay "25V" at 27.438,-34.622 h1.52 r340; Top Overlay "5V" at 68.329,10.258 h1.52 r250; Top Overlay "230V" at -19.232,24.385 h1.52 r250; Top Overlay "25V" at -12.2,-21.17 h1.52 r340; Top Overlay "Shield" at -19.12,-5.093 h1.52 r250; Top Overlay "230V" at -20.623,5.636 h1.52 r250; Top Overlay "Middle" at 0.186,-29.738 h1.52 r340; Top Overlay "15V" at 63.79,-6.315 h1.52 r250; Top Overlay "Middle" at 60.122,-14.475 h1.52 r250